# Altium PCB PCB1.PcbDoc
Units mm, origin at the board's own origin, x right, y up, seen from the top; angles counter-clockwise.
Board outline 152.4 x 101.6 mm, 2 copper layers (Top Layer, Bottom Layer); 5 components, 22 nets, 65 pads, 0 vias.
Unrouted connection lines stored in the file: 1.
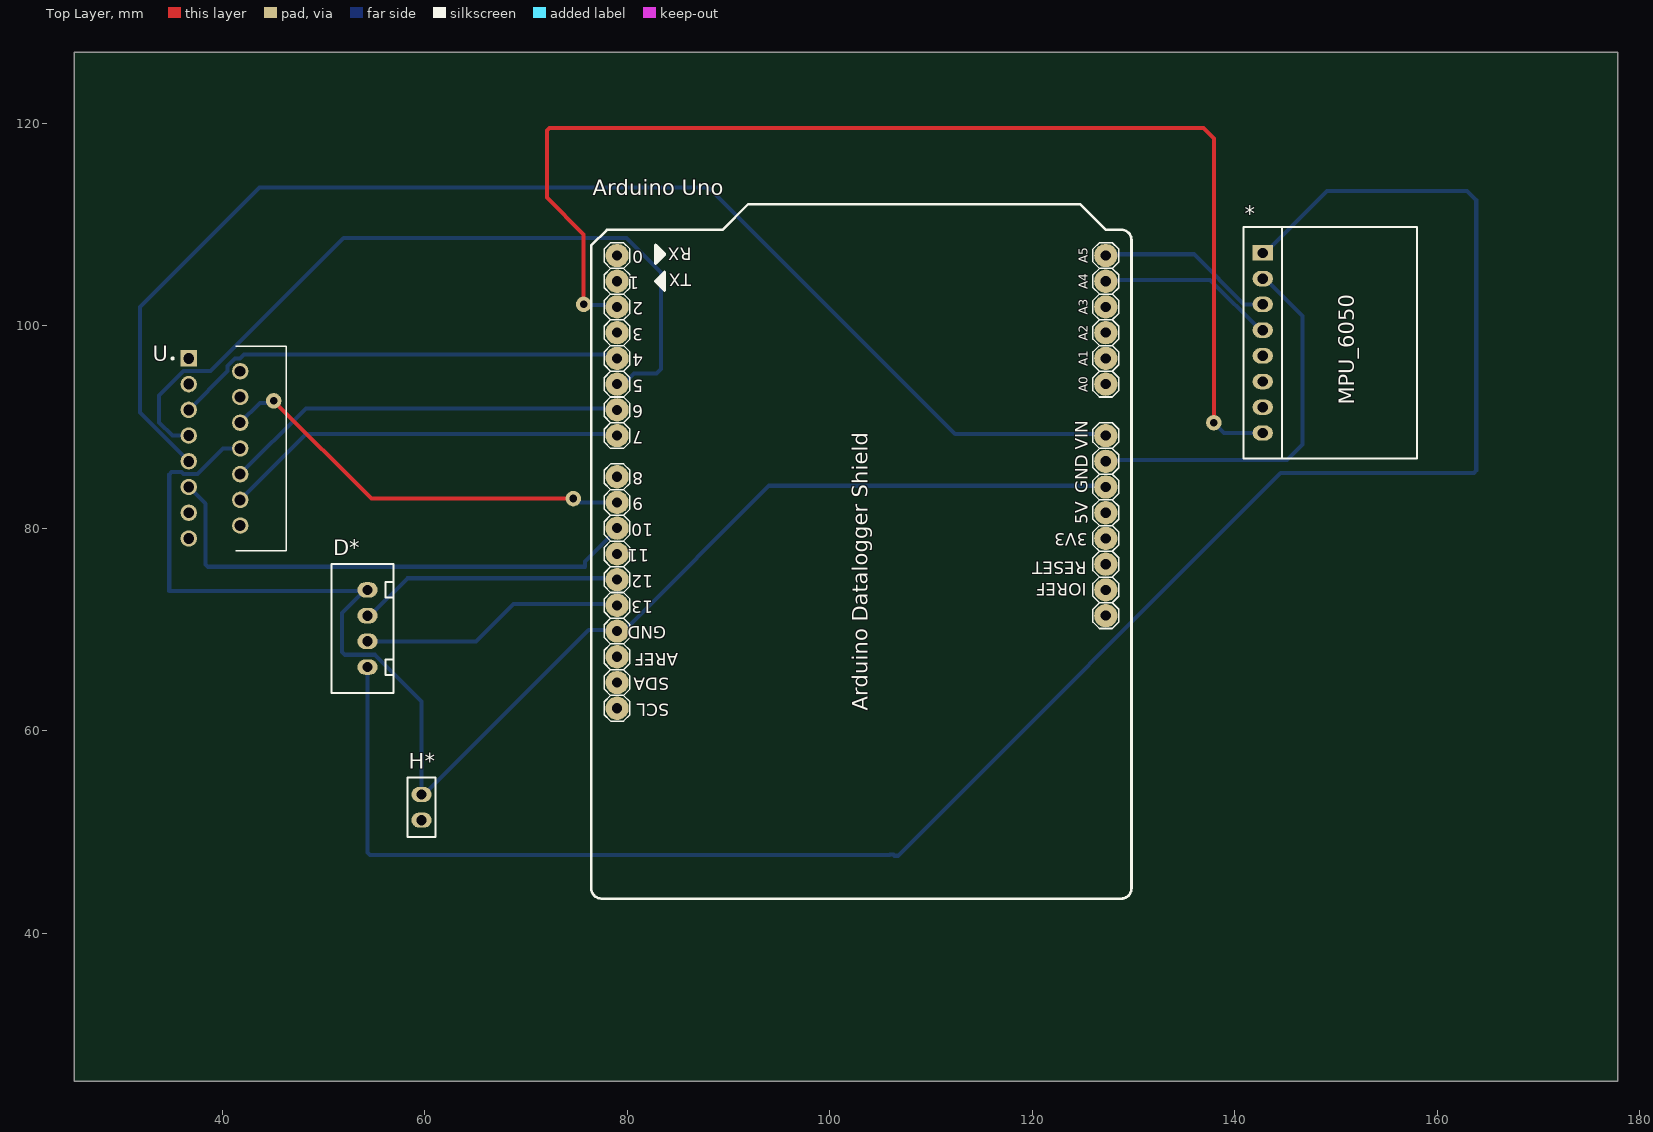
[diagram p0: Top Layer view]
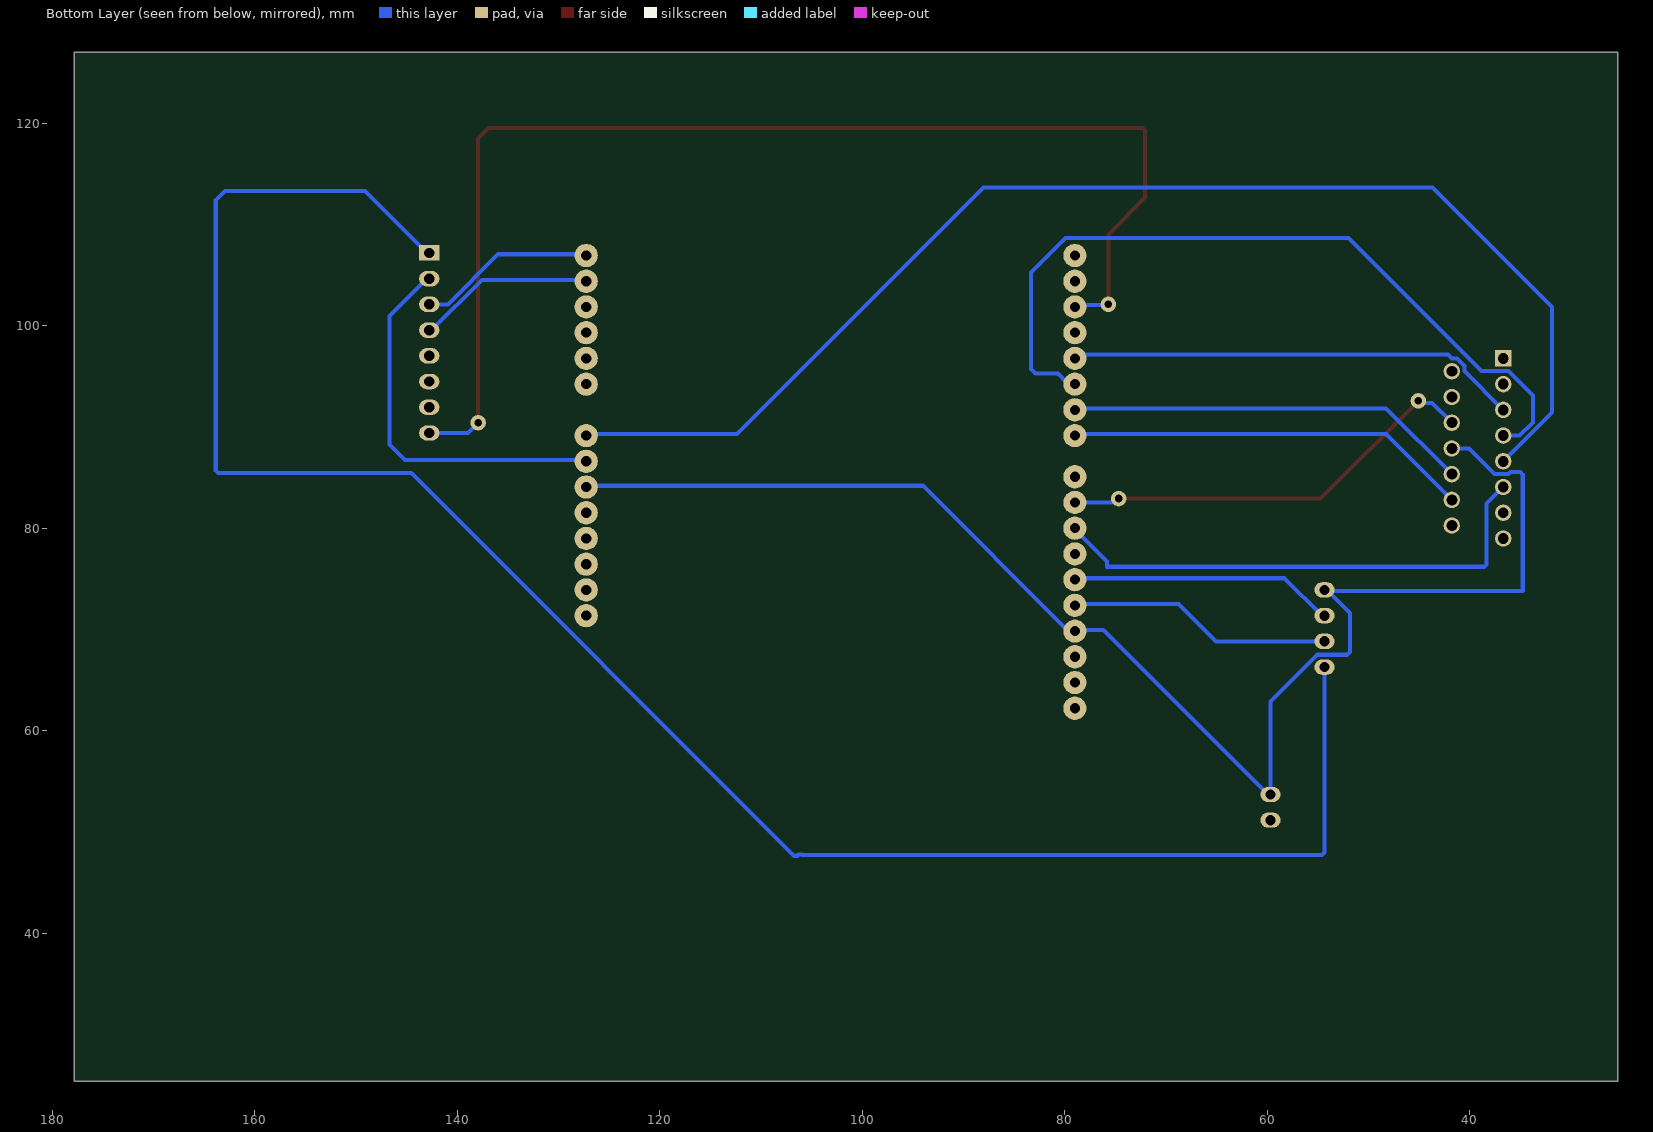
[diagram p1: Bottom Layer view, seen from below]
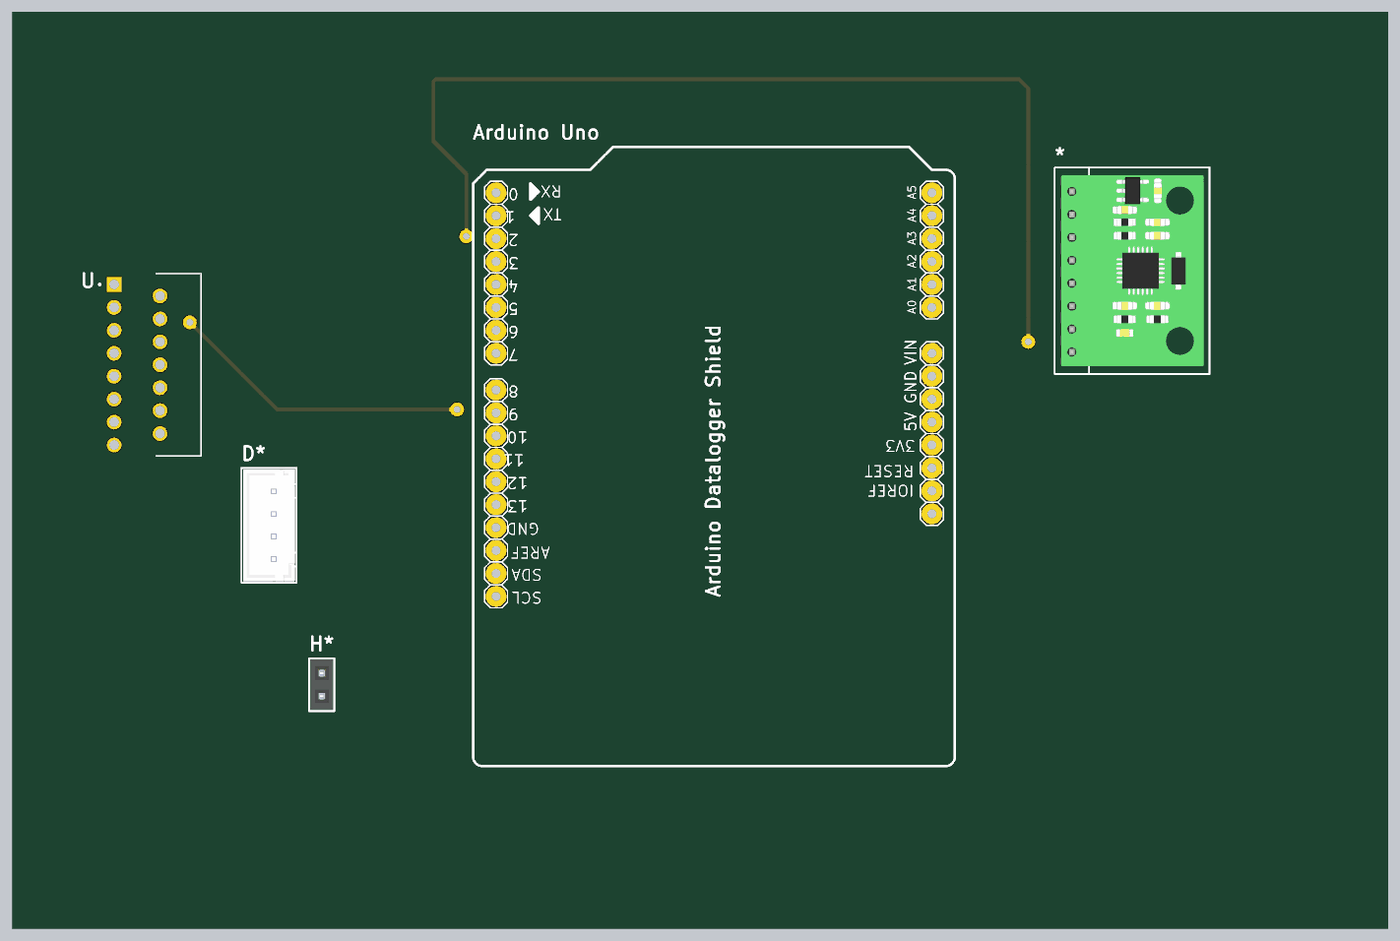
[diagram p2: 3D render of the assembled board from above, using the file's embedded part models]

## Layer stack, top to bottom
Top Solder: solder mask 0.0102, Solder Resist, Dk 3.5
Top Layer: signal copper 0.0356
Dielectric 1: dielectric 0.32, FR-4, Dk 4.8
Bottom Layer: signal copper 0.0356
Bottom Solder: solder mask 0.0102, Solder Resist, Dk 3.5

## Board outline
25.4,25.4 177.8,25.4 177.8,127 25.4,127

## Design rules (kind name [scope] priority, off if disabled: settings)
Clearance [All] p1: gap=0.254 ignorepadtopadclearanceinfootprint=FALSE except(0: Arc-Hole Track-Hole SMDPad-Hole THPad-Hole Via-Hole Fill-Hole Poly-Hole Region-Hole Text-Hole)
PolygonConnect [All] p1: connectstyle=Relief reliefconductorwidth=0.254 reliefentries=4 polygonreliefangle="90 Angle" airgapwidth=0.254
RoutingVias [All] p1: holewidth=0.711 width=1.27 viastyle="Through Hole" minholewidth=0.711 minwidth=1.27 maxholewidth=0.711 maxwidth=1.27
SolderMaskExpansion [All] p1: expansion=0.102 istentingtop=FALSE
Width [All] p1: maxlimit=1 minlimit=0.254 preferedwidth=0.4 minimp=50.000000 maximp=50.000000 favimp=50.000000
30 further rules are at their usual default settings.

## Components (designator, comment, footprint, x,y, rotation, side; value= is the part's Value field where it differs from the comment)
* "MPU_6050" MPU6050 142.748,98.298 r90 top
"Arduino Uno" "ARDUINO UNO" "Arduino Uno" 103.254,79.494 r90 top
D* "UltraSonic" DATA_PIN_HEADER_4_2.54m 54.356,70.104 r90 top
H* "terminal block" FEMALE_HEADER_2 59.686,52.45 r90 top
U "L298N" TO127P2020X500X2100-15 36.703,96.774 r0 top

## Footprints (in the part's own frame and the unit in brackets; to place one, negate y for a bottom-side part, rotate by r counter-clockwise, add the part's x,y. Pads: shape width x height; smd on the part's side, far side on the other; paste and mask are expansions set on the pad)
"Arduino Uno" [mm]
  round 2.3 hole 1: 0(27.44,24.26) 1(24.9,24.26) 2(22.36,24.26) 3(19.82,24.26) 3.3V(-0.5,-24) 4(17.28,24.26) 5(14.74,24.26) 5V(2.04,-24) 6(12.2,24.26) 7(9.66,24.26) 8(5.596,24.26) 9(3.056,24.26) 10(0.516,24.26) 11(-2.024,24.26) 12(-4.564,24.26) 13(-7.104,24.26) A0(14.74,-24) A1(17.28,-24) A2(19.82,-24) A3(22.36,-24) A4(24.9,-24) A5(27.44,-24) AREF(-12.184,24.26) GND1(7.12,-24) GND2(4.58,-24) GND3(-9.644,24.26) IOREF(-5.58,-24) NC(-8.12,-24) RST(-3.04,-24) SCL(-17.264,24.26) SDA(-14.724,24.26) Vin(9.66,-24)
  silkscreen extent -36.06,-26.54 32.52,26.8
DATA_PIN_HEADER_4_2.54m [mil]
  oval 60x78.74 hole 40: 1(-150,0) 2(-50,0) 3(50,0) 4(150,0)
  silkscreen extent -250,-100 250,140, body extent -244,-94 244,133, height 276
FEMALE_HEADER_2 [mm]
  oval 1.5x2 hole 1.016: 1(-1.269,-0.004) 2(1.271,-0.004)
  silkscreen extent -2.92,-1.4 2.92,1.39, body extent -2.79,-1.27 2.8,1.27, height 8.52
MPU6050 [mm]
  oval 1.524x2 hole 1.02: ADO(-6.35,0) GND(6.35,0) INT(-8.89,0) SCL(3.81,0) SDA(1.27,0) XCL(-3.81,0) XDA(-1.27,0)
  rect 1.524x2 hole 1.02: VCC(8.89,0)
  silkscreen extent -11.43,-15.24 11.43,1.91, body extent -10.55,-14.6 10.55,1.27, height 14.64
TO127P2020X500X2100-15 [mm]
  rect 1.62x1.62 hole 1.08: 1(0,0)
  round 1.62 hole 1.08: 2(5.08,-1.27) 3(0,-2.54) 4(5.08,-3.81) 5(0,-5.08) 6(5.08,-6.35) 7(0,-7.62) 8(5.08,-8.89) 9(0,-10.16) 10(5.08,-11.43) 11(0,-12.7) 12(5.08,-13.97) 13(0,-15.24) 14(5.08,-16.51) 15(0,-17.78)
  silkscreen extent -1.69,-18.99 9.63,1.21

## Part data
D*: library part DATA_PIN_HEADER_4_2.54m
H*: library part FEMALE_HEADER_2
U: "Half Bridge _4_ Driver DC Motors, Relays, Solenoids, Stepper Motors Bipolar 15-Multiwatt", Package="Multiwatt-15 STMicroelectronics", Availability=Unavailable, MF=STMicroelectronics, MP=L298N, Price=None, SnapEDA_Link=https://www.snapeda.com/parts/L298N/STMicroelectronics/view-part/294022/?ref=snap

## Free pads (board coordinates)
  round 1.524 hole 0.762: 2(75.692,102.108) 3(137.922,90.424) 4(45.085,92.583) 5(74.676,82.931)

## Nets (pads, with @x,y where several pads share a name; then routed paths per layer and width w, separated by ;. In a path a pad name is that pad's centre, name@x,y a point inside that pad or via, vN(x,y) a via of type N, cw(c..) or ccw(c..) an arc to the next point about the centre after c; other vN are vias at no path point)
+5: *.VCC D*.1 | length 194.4
  Bottom Layer w0.4: D*.1 54.356,47.986 54.59,47.752 105.918,47.752 105.943,47.777 106.274,47.777 106.387,47.664 106.719,47.664 144.526,85.471 163.596,85.471 163.83,85.705 163.83,112.395 162.941,113.284 149.082,113.284 142.986,107.188 *.VCC
+12: H*.1
Echo: "Arduino Uno.12" D*.3 | length 26.4
  Bottom Layer w0.4: D*.3 54.594,71.374 58.285,75.065 79.245,75.065
EN_A: "Arduino Uno.9" pad.4 pad.5 U.6 | length 42.3
  Top Layer w0.4: pad.4 54.737,82.931 pad.5
  Bottom Layer w0.4: U.6 43.727,92.368 44.87,92.368 pad.4 ; pad.5 74.98,82.931 75.361,82.55 78.994,82.55
EN_B: "Arduino Uno.10" U.11 | length 51.2
  Bottom Layer w0.4: U.11 38.354,82.423 38.354,76.434 38.588,76.2 75.819,76.2 75.819,76.719 79.245,80.145
IN_1: "Arduino Uno.4" U.5 | length 45
  Bottom Layer w0.4: U.5 40.519,95.51 40.519,96.028 41.259,96.768 41.777,96.768 42.164,97.155 77.81,97.155 77.827,97.138 78.63,97.138 78.994,96.774
IN_2: "Arduino Uno.5" U.7 | length 77.7
  Bottom Layer w0.4: U.7 35.088,89.154 33.782,90.46 33.782,93.101 36.191,95.51 38.842,95.51 52.005,108.673 79.909,108.673 83.312,105.27 83.312,95.738 82.872,95.298 80.688,95.298 79.759,94.369 79.245,94.369
IN_3: "Arduino Uno.6" U.10 | length 40.1
  Bottom Layer w0.4: U.10 48.268,91.829 79.245,91.829
IN_4: "Arduino Uno.7" U.12 | length 40.1
  Bottom Layer w0.4: U.12 48.268,89.289 79.245,89.289
INT_1: "Arduino Uno.2" *.INT pad.2 pad.3 | length 122
  Top Layer w0.4: pad.2 75.692,109.03 72.067,112.655 72.067,119.273 72.301,119.507 136.906,119.507 137.922,118.491 pad.3
  Bottom Layer w0.4: pad.2 75.751,102.049 79.186,102.049 79.245,101.989 ; pad.3 138.938,89.408 *.INT
N_12: "Arduino Uno.Vin" U.9 | length 127.9
  Bottom Layer w0.4: U.9 31.877,91.44 31.877,101.854 43.688,113.665 88.011,113.665 112.387,89.289 127.505,89.289
N_GND: "Arduino Uno.GND1" "Arduino Uno.GND2" "Arduino Uno.GND3" *.GND D*.4 H*.2 U.8 | length 183.7
  Bottom Layer w0.4: U.8 40.083,87.884 37.549,85.35 36.179,85.35 35.971,85.559 35.013,85.559 34.778,85.324 34.778,73.787 D*.4@53.991,73.787 ; D*.4 54.118,73.914 D*.4@53.991,73.787 ; 128.016,84.201 93.98,84.201 79.756,69.977 76.196,69.977 59.94,53.721 H*.2 59.69,62.918 55.098,67.51 52.124,67.51 51.855,67.779 51.855,71.651 D*.4@53.991,73.787 ; 128.016,86.741 145.161,86.741 146.685,88.265 146.685,100.949 142.986,104.648 *.GND
NetD?_1: 
NetD?_2: 
NetQ?_2: 
OUT_1: U.2
OUT_2: U.3
OUT_3: U.13
OUT_4: U.14
SCL_1: "Arduino Uno.A5" *.SCL | length 16.8
  Bottom Layer w0.4: 128.016,107.061 135.942,107.061 140.895,102.108 *.SCL
SDA_1: "Arduino Uno.A4" *.SDA | length 16.8
  Bottom Layer w0.4: 128.016,104.521 137.557,104.521 142.51,99.568 *.SDA
Trig: "Arduino Uno.13" D*.2 | length 26.4
  Bottom Layer w0.4: D*.2 65.077,68.834 68.768,72.525 79.245,72.525
pads on no net: "Arduino Uno.0" "Arduino Uno.1" "Arduino Uno.3" "Arduino Uno.3.3V" "Arduino Uno.5V" "Arduino Uno.8" "Arduino Uno.11" "Arduino Uno.A0" "Arduino Uno.A1" "Arduino Uno.A2" "Arduino Uno.A3" "Arduino Uno.AREF" "Arduino Uno.IOREF" "Arduino Uno.NC" "Arduino Uno.RST" "Arduino Uno.SCL" "Arduino Uno.SDA" *.ADO *.XCL *.XDA U.1 U.4 U.15

## Text inside footprints (layer, text, board x,y; h text height)
"Arduino Uno": Top Overlay "5V" at 125.476,80.391 h1.21 r90; Top Overlay "A0" at 125.451,93.447 h0.86 r90; Top Overlay "AREF" at 85.051,67.68 h1.21 r180; Top Overlay "GND" at 83.868,70.322 h1.21 r180; Top Overlay "RESET" at 125.349,76.708 h1.21 r180; Top Overlay "3V3" at 125.476,79.502 h1.21 r180; Top Overlay "A1" at 125.451,95.987 h0.86 r90; Top Overlay "A2" at 125.451,98.527 h0.86 r90; Top Overlay "A3" at 125.451,101.067 h0.86 r90; Top Overlay "A4" at 125.451,103.607 h0.86 r90; Top Overlay "A5" at 125.451,106.147 h0.86 r90; Top Overlay "VIN" at 125.476,87.757 h1.21 r90; Top Overlay "GND" at 125.476,83.464 h1.21 r90; Top Overlay "IOREF" at 125.349,74.549 h1.21 r180; Top Overlay "TX" at 86.335,105.156 h1.21 r180; Top Overlay "RX" at 86.36,107.696 h1.21 r180; Top Overlay "13" at 82.585,72.837 h1.21 r180; Top Overlay "12" at 82.585,75.377 h1.21 r180; Top Overlay "11" at 82.182,77.917 h1.21 r180; Top Overlay "10" at 82.585,80.457 h1.21 r180; Top Overlay "9" at 81.578,82.997 h1.21 r180; Top Overlay "8" at 81.578,85.537 h1.21 r180; Top Overlay "7" at 81.578,89.601 h1.21 r180; Top Overlay "6" at 81.578,92.141 h1.21 r180; Top Overlay "5" at 81.578,94.681 h1.21 r180; Top Overlay "4" at 81.578,97.221 h1.21 r180; Top Overlay "3" at 81.578,99.761 h1.21 r180; Top Overlay "2" at 81.578,102.301 h1.21 r180; Top Overlay "1" at 81.175,104.841 h1.21 r180; Top Overlay "0" at 81.578,107.381 h1.21 r180; Top Overlay "SCL" at 84.154,62.694 h1.21 r180; Top Overlay "SDA" at 84.167,65.223 h1.21 r180; Top Overlay "Arduino Datalogger Shield" at 103.754,61.994 h1.52 r90